# Altium PCB IRIS2_PCB_CPU.PcbDoc (part 1 of 2)
Units mil, origin at the board's own origin, x right, y up, seen from the top; angles counter-clockwise.
Board outline 3935 x 3935 mil, 4 copper layers (Top Layer, GND, Power, Bottom Layer), stack 67.17 mil thick; 109 components, 87 nets, 432 pads, 298 vias.
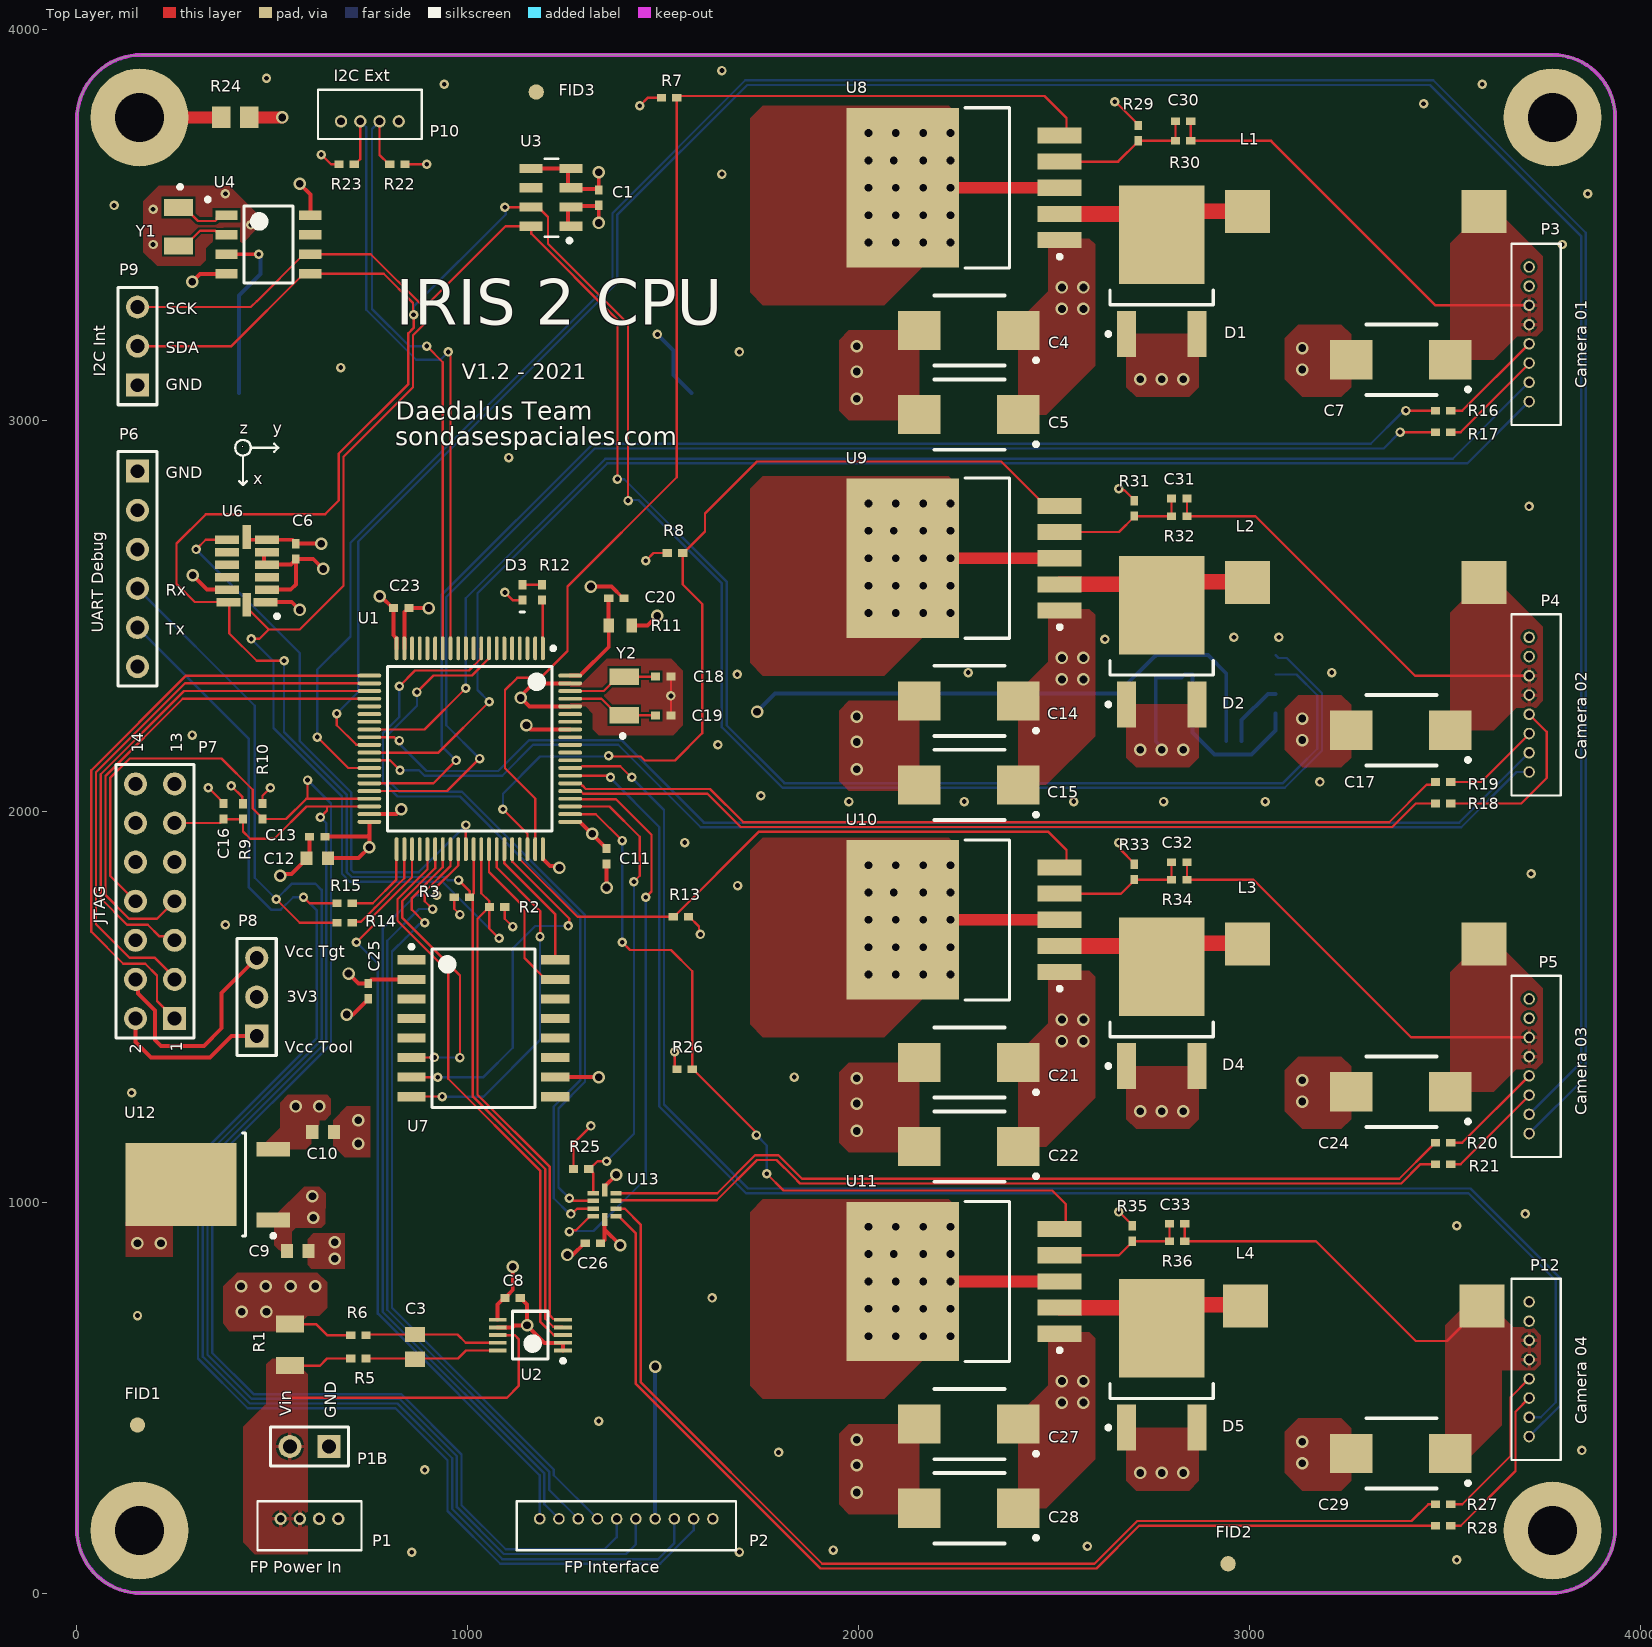
[diagram p0: Top Layer view]
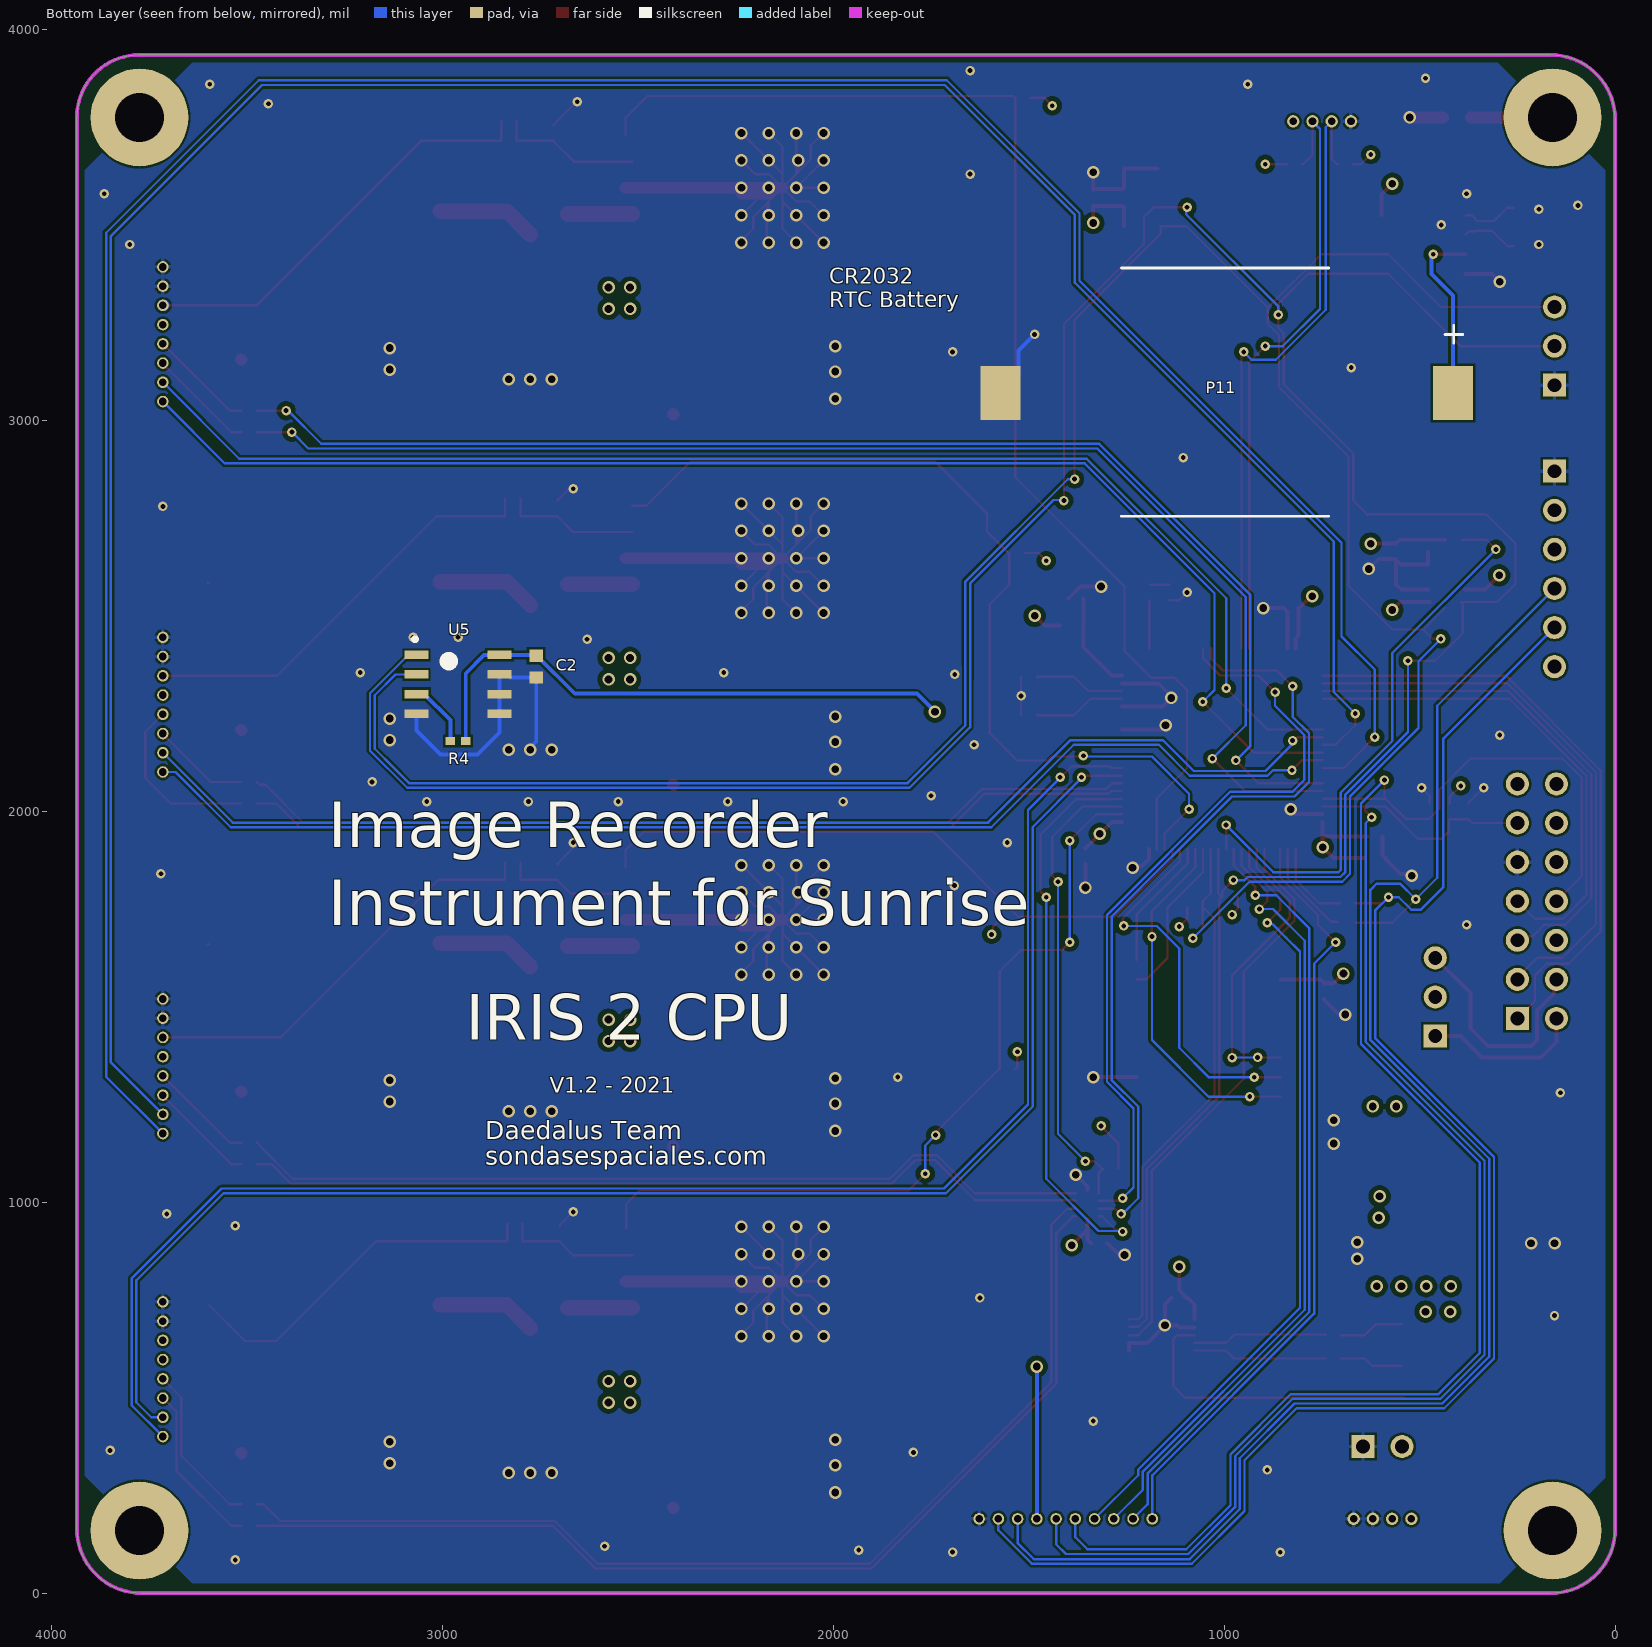
[diagram p1: Bottom Layer view, seen from below]
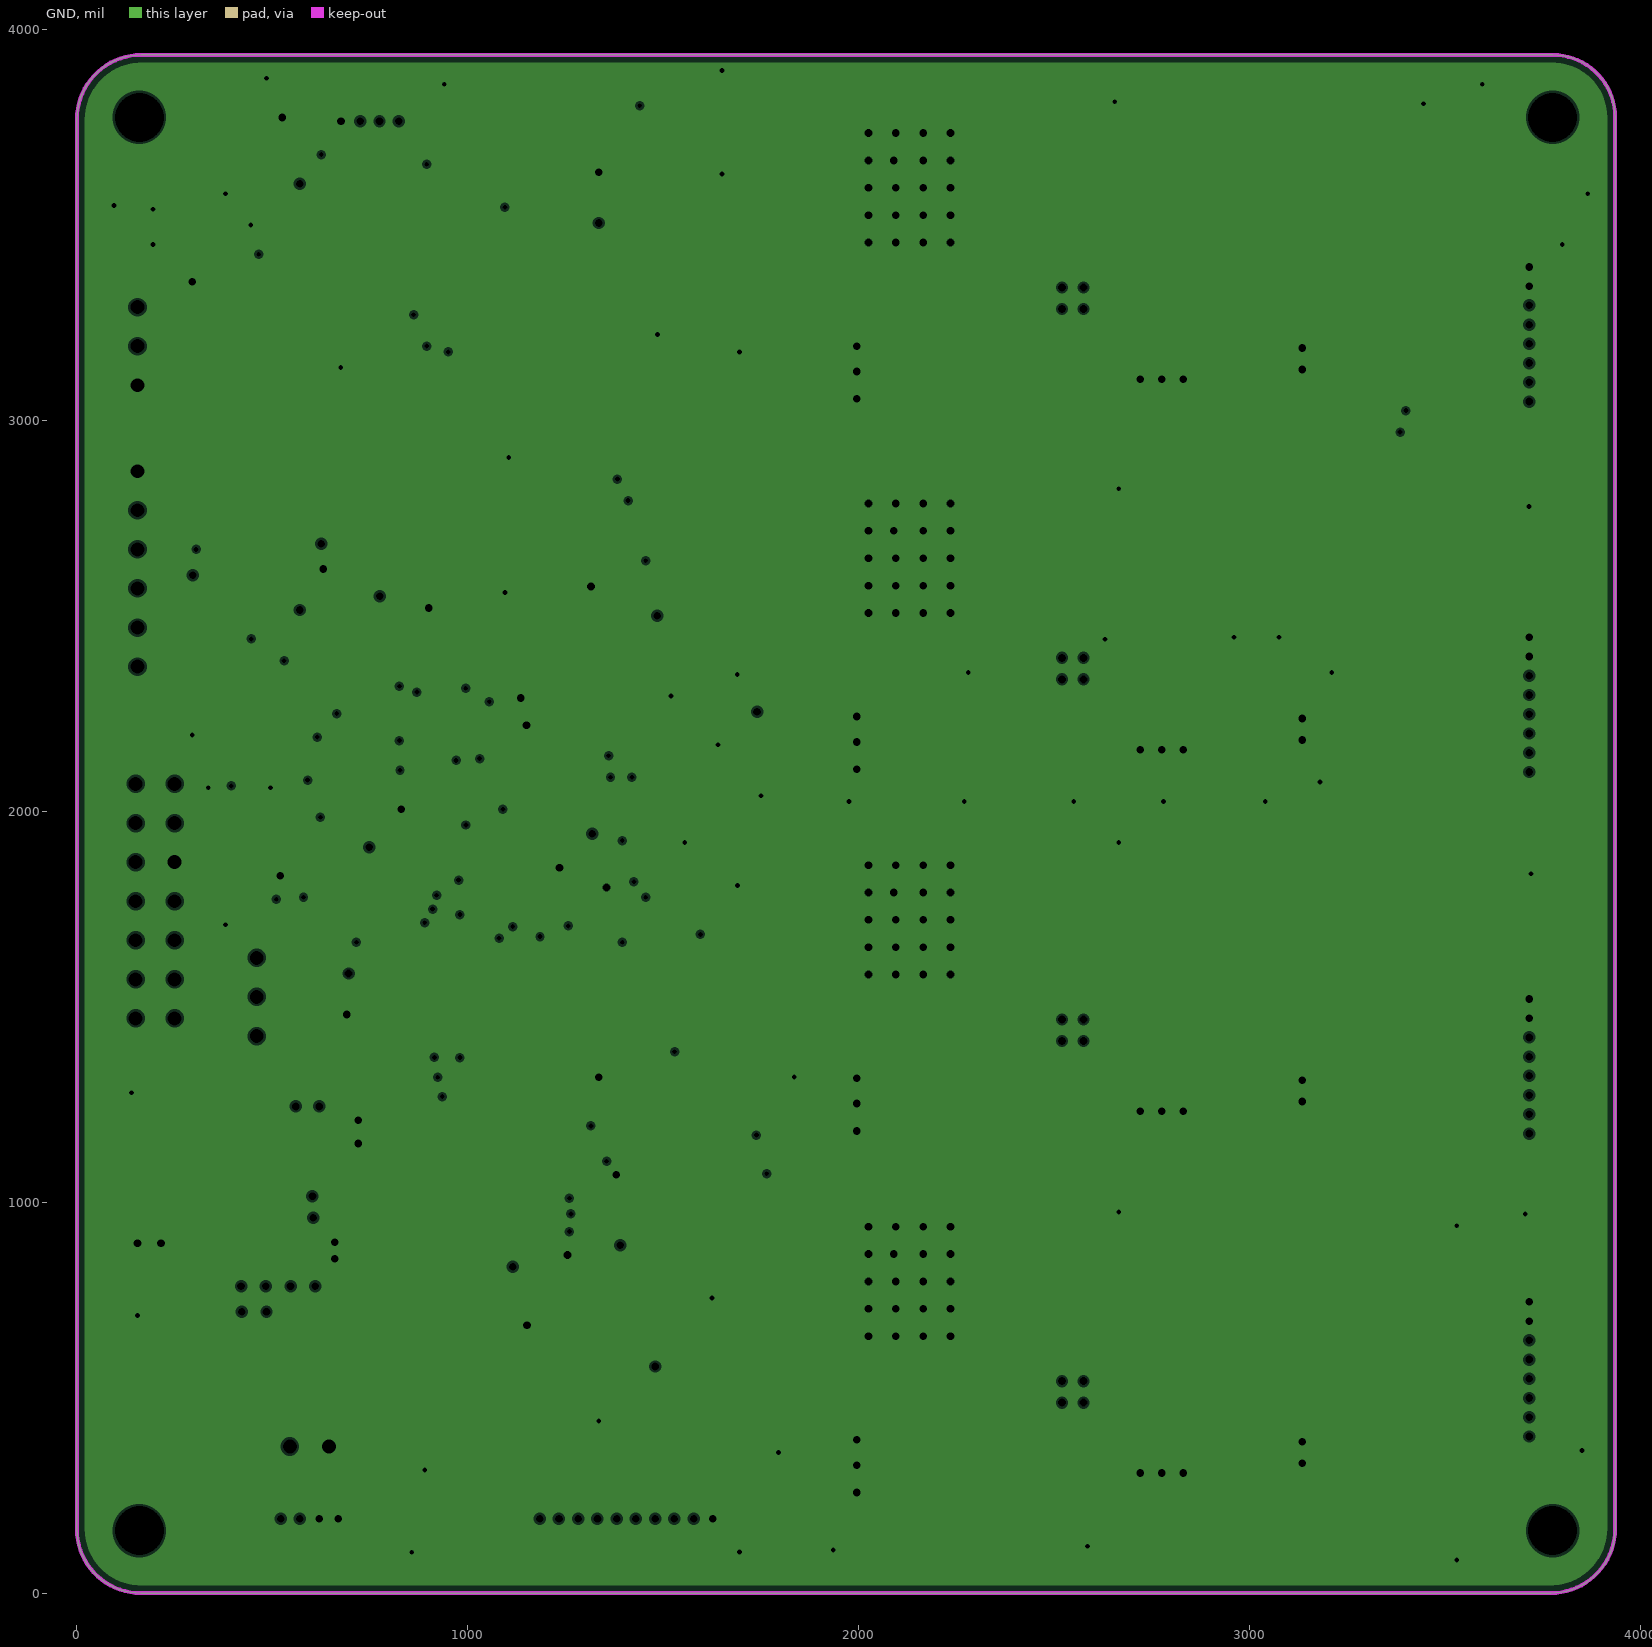
[diagram p2: GND, clearances drawn from the general rule]
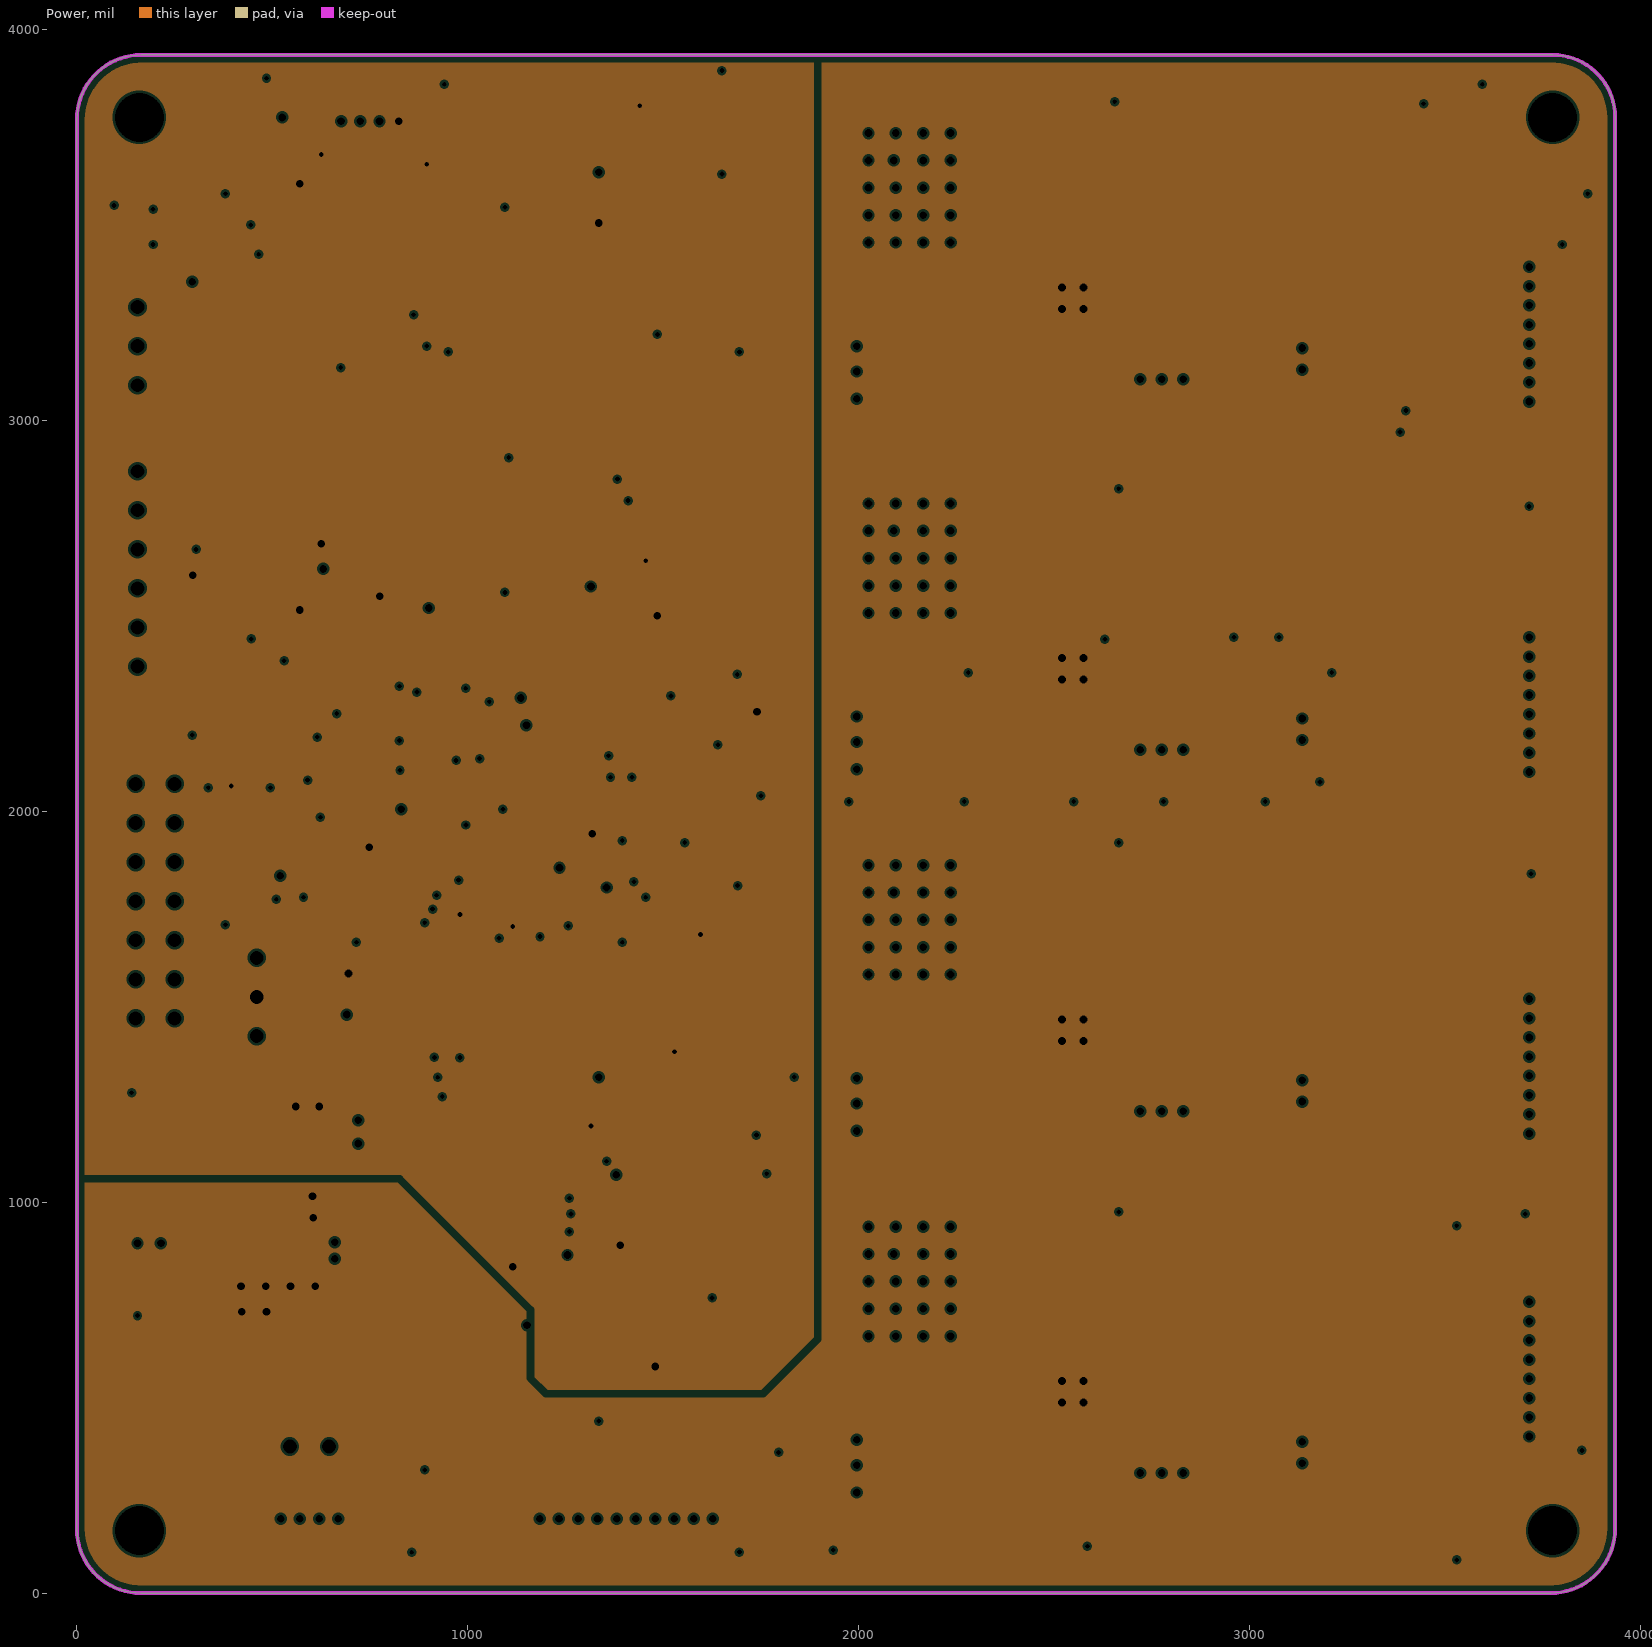
[diagram p3: Power, clearances drawn from the general rule]

## Layer stack, top to bottom
Top Solder: solder mask 0.4, Solder Resist, Dk 3.5
Top Layer: signal copper 1.4
Dielectric 2: prepreg 11.811, PP-006, Dk 4.1
GND: plane copper 0.689, net GND
Dielectric 1: dielectric 39.3701, FR-4, Dk 4.8
Power: plane copper 0.689, net (Multiple Nets)
Dielectric 3: prepreg 11.811, PP-006, Dk 4.1
Bottom Layer: signal copper 1.4
Bottom Solder: solder mask 0.4, Solder Resist, Dk 3.5

## Board outline
163.39,0 cw(c163.39,163.39) 0,163.39 0,3770 cw(c165,3770) 165,3935 3775.36,3935 cw(c3775.36,3775.36) 3935,3775.36 3935,165 cw(c3770,165) 3770,0

## Design rules (kind name [scope] priority, off if disabled: settings)
Clearance [All] p1: gap=6 ignorepadtopadclearanceinfootprint=TRUE except(0: Arc-Hole Track-Hole SMDPad-Hole THPad-Hole Via-Hole Fill-Hole Poly-Hole Region-Hole Text-Hole; 12: Arc-Via Track-Via SMDPad-Via THPad-Via Via-Via Via-Fill Via-Poly Via-Region)
PlaneClearance [All] p1: clearance=6
PlaneConnect [All] p1: pad.planeconnectstyle=Relief pad.reliefexpansion=10 pad.reliefentries=4 pad.reliefconductorwidth=10 pad.reliefairgap=10 via.planeconnectstyle=Direct via.reliefexpansion=20 via.reliefentries=4 via.reliefconductorwidth=10 via.reliefairgap=10
PolygonConnect [All] p1: thpad.connectstyle=Relief thpad.reliefconductorwidth=10 thpad.reliefentries=4 thpad.polygonreliefangle="90 Angle" thpad.airgapwidth=6 smdpad.connectstyle=Direct smdpad.reliefconductorwidth=10 smdpad.reliefentries=4 smdpad.polygonreliefangle="90 Angle" smdpad.airgapwidth=10 via.connectstyle=Direct via.reliefconductorwidth=10 via.reliefentries=4 via.polygonreliefangle="90 Angle" via.airgapwidth=10
RoomDefinition IRIS2_PCB_CPU [InComponentClass('IRIS2_PCB_CPU')] p1 off: confinementstyle=ConfineIn formatcopy=TRUE lockcomponents=FALSE outline 0,7565 2790,7565 2790,9835 0,9835
RoutingVias [All] p1: holewidth=11.81 width=6.02 viastyle="Through Hole" minholewidth=11.81 minwidth=6.02 maxholewidth=19.68 maxwidth=50
SolderMaskExpansion [All] p1: expansion=6 istentingtop=FALSE
Width [All] p1: maxlimit=100 minlimit=6 preferedwidth=6 minimp=50.000000 maximp=50.000000 favimp=50.000000
28 further rules are at their usual default settings.

## Components (designator, comment, footprint, x,y, rotation, side; value= is the part's Value field where it differs from the comment)
C1 "16V" 0402 1335,3570 r90 top value=100nF
C2 "10V" 1608[0603] 2760,2370 r270 bottom value=10uF
C3 "50V" 6-0805_L 865,630 r90 top value=100nF
C4 "Cap Pol2" "2917 [7343 Metric]" 2408.54,3230 r180 top value=220uF
C5 "Cap Pol2" "2917 [7343 Metric]" 2408.54,3015 r180 top value=220uF
C6 "16V" 0402 560,2665 r270 top value=100nF
C7 "Cap Pol2" "2917 [7343 Metric]" 3513.54,3155 r180 top value=220uF
C8 "16V" 0402 1114.69,755 r180 top value=100nF
C9 "Cap" 1608[0603] 565,875 r180 top value=1uF
C10 "10V" 1608[0603] 630,1180 r0 top value=10uF
C11 "16V" 0402 1355,1885 r270 top value=100nF
C12 "10V" 1608[0603] 615,1880 r180 top value=10uF
C13 "16V" 0402 615,1935 r180 top value=100nF
C14 "Cap Pol2" "2917 [7343 Metric]" 2408.54,2282.36 r180 top value=220uF
C15 "Cap Pol2" "2917 [7343 Metric]" 2408.54,2067.36 r180 top value=220uF
C16 "50V" 0402 375,2000 r90 top value=2nF
C17 "Cap Pol2" "2917 [7343 Metric]" 3513.54,2207.36 r180 top value=220uF
C18 "Cap" 0402 1500,2345 r0 top value=22p
C19 "Cap" 0402 1500,2245 r0 top value=22p
C20 "16V" 0402 1380,2545 r0 top value=100nF
C21 "Cap Pol2" "2917 [7343 Metric]" 2408.54,1357.36 r180 top value=220uF
C22 "Cap Pol2" "2917 [7343 Metric]" 2408.54,1142.36 r180 top value=220uF
C23 "16V" 0402 829.68,2520 r0 top value=100nF
C24 "Cap Pol2" "2917 [7343 Metric]" 3513.54,1282.36 r180 top value=220uF
C25 "16V" 0402 745,1540 r270 top value=100nF
C26 "16V" 0402 1320,895 r180 top value=100nF
C27 "Cap Pol2" "2917 [7343 Metric]" 2408.54,432.36 r180 top value=220uF
C28 "Cap Pol2" "2917 [7343 Metric]" 2408.54,217.36 r180 top value=220uF
C29 "Cap Pol2" "2917 [7343 Metric]" 3513.54,357.36 r180 top value=220uF
C30 "16V" 0402 2830,3765 r180 top value=100nF
C31 "16V" 0402 2820,2800 r180 top value=100nF
C32 "16V" 0402 2820,1870 r180 top value=100nF
C33 "16V" 0402 2814.69,945 r180 top value=100nF
D1 "VS-30WQ03FN Diode" VS-30WQ03FN 2775,3382.48 r90 top
D2 "VS-30WQ03FN Diode" VS-30WQ03FN 2775,2434.84 r90 top
D3 "Debug LED" 0402-A 1140,2560 r90 top
D4 "VS-30WQ03FN Diode" VS-30WQ03FN 2775,1509.84 r90 top
D5 "VS-30WQ03FN Diode" VS-30WQ03FN 2775,584.84 r90 top
FID1 "Fiducial for pick&place" FiducialPoint 155,430 r90 top
FID2 "Fiducial for pick&place" FiducialPoint 2945,75 r90 top
FID3 "Fiducial for pick&place" FiducialPoint 1175,3840 r90 top
L1 "Inductor" DO5022P-473MLB 3600,3535 r180 top value=47uH
L2 "Inductor" DO5022P-473MLB 3600,2585 r180 top value=47uH
L3 "Inductor" DO5022P-473MLB 3600,1660 r180 top value=47uH
L4 "Inductor" DO5022P-473MLB 3595,735 r180 top value=47uH
P1 "Header 4" 53047-0410 521.18,190 r0 top
P1B "Header 2" HDR1X2 645,375 r180 top
P2 "Header 10" 530471010 1282.36,190 r0 top
P3 "Header 8" 0530470810 3715,3048.15 r90 top
P4 "Header 8" 0530470810 3715,2100.51 r90 top
P5 "Header 8" 0530470810 3715,1175.51 r90 top
P6 "Header 6" HDR1X6 155,2870 r270 top
P7 "Header 7X2" HDR2X7 250,1470 r90 top
P8 "Header 3" HDR1X3 460,1425 r90 top
P9 "Header 3" HDR1X3 155,3090 r90 top
P10 "Header 4" 53047-0410 823.43,3765 r180 top
P11 "CR2032 Battery Holder" SMTU2032-LF 1572.48,3070 r180 bottom
P12 "Header 8" 0530470810 3715,400.51 r90 top
R1 "Res1" INDC3216 545,635 r90 top value=2m
R2 "Res1" 0402 1075,1755 r180 top value=4.75k
R3 "Res1" 0402 985,1780 r0 top value=4.75k
R4 "Res1" 0402 2960,2180 r0 bottom value=5K
R5 "Res1" 0402 720,600 r180 top value=10
R6 "Res1" 0402 720,660 r180 top value=10
R7 "Res1" 0402 1515,3825 r0 top value=47.5K
R8 "Res1" 0402 1530,2660.79 r0 top value=47.5K
R9 "Res1" 0402 425,1999.68 r270 top value=47.5K
R10 "Res1" 0402 475,2000 r90 top value=33K
R11 "Res1" J1-0603 1390,2475 r180 top value=0
R12 "Res1" 0402 1190,2560 r270 top value=1.37K
R13 "Res1" 0402 1545,1730 r180 top value=47.5K
R14 "Res1" 0402 685,1715 r180 top value=1.37K
R15 "Res1" 0402 685,1765 r180 top value=1.37K
R16 "Res1" 0402 3495,3025 r0 top value=1.37K
R17 "Res1" 0402 3495,2970 r0 top value=1.37K
R18 "Res1" 0402 3495,2020 r0 top value=1.37K
R19 "Res1" 0402 3495,2075 r0 top value=1.37K
R20 "Res1" 0402 3495,1152.36 r0 top value=1.37K
R21 "Res1" 0402 3495,1097.36 r0 top value=1.37K
R22 "Res1" 0402 820,3655 r180 top value=4.75k
R23 "Res1" 0402 690,3655 r0 top value=4.75k
R24 "Res1" 6-0805_N 405,3775 r180 top value=20M
R25 "Res1" 0402 1290,1085 r0 top value=47.5K
R26 "Res1" 0402 1554.68,1340 r0 top value=47.5K
R27 "Res1" 0402 3495,227.36 r0 top value=1.37K
R28 "Res1" 0402 3495,172.36 r0 top value=1.37K
R29 "Res1" 0402 2715,3735 r270 top value=1.37K
R30 "Res1" 0402 2830,3715 r180 top value=3K
R31 "Res1" 0402 2705,2775 r270 top value=1.37K
R32 "Res1" 0402 2820,2755 r180 top value=3K
R33 "Res1" 0402 2705,1845 r270 top value=1.37K
R34 "Res1" 0402 2820,1825 r180 top value=3K
R35 "Res1" 0402 2699.69,920 r270 top value=1.37K
R36 "Res1" 0402 2814.69,900 r180 top value=3K
U1 "MSP430FR5994" MSP430FR59941PN 1005,2160 r270 top
U2 "INA226-Q1 Power Monitor" INA226-Q1 1160,660 r180 top
U3 "MS5611-01BA01" MS5611-01BA01 1256.61,3496.57 r180 top
U4 "RTC DS1338Z-33+" DS1338Z-33+ 490,3450 r0 top
U5 "TMP75C-Q1" TMP75C-Q1 2960,2325 r180 bottom
U6 "ADXL345-EP" ADXL345-EP 435,2615 r180 top
U7 "S70FL01GS" SPIFlash_S70FL01GSAGMFV010 1040,1445 r0 top
U8 "5V Buck converter" DPAK170P1435X457-6N 2270,3595 r180 top
U9 "5V Buck converter" DPAK170P1435X457-6N 2270,2647.36 r180 top
U10 "5V Buck converter" DPAK170P1435X457-6N 2270,1722.36 r180 top
U11 "5V Buck converter" DPAK170P1435X457-6N 2270,797.36 r180 top
U12 "BD433M5FP-CE2" BD433M5FP-CE2 335,1045 r180 top locked
U13 "PI3USB221AZWEX" PI3USB221AZWEX 1350,995 r180 top
Y1 "XTAL" XTAL_ECS-.327-9-34R-TR 260,3495 r270 top
Y2 "XTAL" XTAL_ECS-.327-9-34R-TR 1400,2295 r90 top

## Footprints (in the part's own frame and the unit in brackets; to place one, negate y for a bottom-side part, rotate by r counter-clockwise, add the part's x,y. Pads: shape width x height; smd on the part's side, far side on the other; paste and mask are expansions set on the pad)
6-0805_L [mm] "Chip Resistor, Body 2.0x1.2mm, IPC High Density"
  rect 1x1.3 smd: 1(-0.8,0) 2(0.8,0)
  body extent -1.07,-0.7 1.07,0.7, height 0.7
6-0805_N [mm] "Chip Resistor, Body 2.0x1.2mm, IPC Medium Density"
  rect 1.2x1.4 smd: 1(-0.9,0) 2(0.9,0)
  body extent -1.07,-0.7 1.07,0.7, height 0.7
0402 [mm] "Chip Capacitor, Body 1.0x0.5mm, IPC High Density"
  rect 0.6x0.5 smd: 1(-0.5,0) 2(0.5,0)
  body extent -0.55,-0.3 0.55,0.3, height 1.3
0402-A [mm] "Chip Inductor, Body 1.0x0.5mm, IPC High Density"
  rect 0.6x0.5 smd: 1(-0.5,0) 2(0.5,0)
  silkscreen extent -1.27,-0.13 -1.27,0.17, body extent -0.55,-0.3 0.55,0.3, height 0.55
1608[0603] [mm] "Chip Capacitor, Body 1.6x0.8mm, IPC High Density"
  rect 0.8x0.9 smd: 1(-0.7,0) 2(0.7,0)
  body extent -0.87,-0.48 0.87,0.48, height 1.3
"2917 [7343 Metric]" [mm]
  rect 2.77x2.55 smd: 1(0,0) 2(6.44,0)
  silkscreen extent -1.27,-2.29 5.46,2.29, body extent -0.5,-2.29 7.1,2.31, height 3.11
53047-0410 [mm] "Molex_Picoblade_4pin_53047-0410"
  round 0.8 hole 0.5: 1(3.75,0) 2(2.5,0) 3(1.25,0) 4(0,0)
  silkscreen extent -1.5,-2.05 5.25,1.15, body extent -1.5,-2.05 5.25,1.15, height 4.23
0530470810 [mm] "Molex 0530470810"
  round 0.75 hole 0.5: 1(8.75,0) 2(7.5,0) 3(6.25,0) 4(5,0) 5(3.75,0) 6(2.5,0) 7(1.25,0) 8(0,0)
  silkscreen extent -1.52,-2.05 10.25,1.15, body extent -1.5,-2.05 10.25,1.15, height 4.25
530471010 [mm] "Molex_Picoblade_10pin_530471010"
  round 0.75 hole 0.5: 1(8.75,0) 2(7.5,0) 3(6.25,0) 4(5,0) 5(3.75,0) 6(2.5,0) 7(1.25,0) 8(0,0) 9(-1.25,0) 10(-2.5,0)
  silkscreen extent -3.99,-2.05 10.25,1.15, body extent -3.99,-2.05 10.26,1.15, height 4.25
ADXL345-EP [mm] "PQFN, 14-Leads, Body 3,00x5,00mm, Pitch 0,80mm/0,81mm, IPC Medium Density"
  rect 1.545x0.55 smd: 1(-1.2,2.025) 2(-1.3,1.215) 3(-1.3,0.405) 4(-1.3,-0.405) 5(-1.3,-1.215) 6(-1.3,-2.025) 8(1.3,-2.025) 9(1.3,-1.215) 10(1.3,-0.405) 11(1.3,0.405) 12(1.3,1.215) 13(1.2,2.025)
  rect 0.55x1.545 smd: 7(0,-2.2) 14(0,2.2)
  silkscreen extent -2.08,2.83 -1.83,3.07, body extent -1.5,-2.5 1.5,2.5, height 1
BD433M5FP-CE2 [mm] "D-PAK, 3-Pads, Body 5,95x6,71mm (max), IPC Medium Density"
  rect 2.2x0.95 smd: 1(-4.25,2.3) 3(-4.25,-2.3)
  rect 7.2x5.4 smd: 4(1.75,0)
  silkscreen extent -4.38,-3.35 -2.25,3.45, body extent -2.45,-3.35 4.89,3.35, height 2.5
DO5022P-473MLB [mil] "Inductor DO5022P-473MLB"
  rect 115x110 smd: 1(0,0) 2(605,0)
  body extent 52,-250 552,250, height 280
DPAK170P1435X457-6N [mm] "D2-PAK, 6-Pads, Body 7,55x8,54mm (max), IPC Medium Density"
  rect 2.85x1.05 smd: 1(-6.2,3.4) 2(-6.2,1.7) 3(-6.2,0) 4(-6.2,-1.7) 5(-6.2,-3.4)
  rect 7.3x10.35 smd: 6(4,0)
  silkscreen extent -6.33,-5.2 -0.05,5.2, body extent -7.23,-5.17 6.98,5.18, height 4.57
DS1338Z-33+ [mm] "TSOP, 8-Leads, Body 4,90x3,90mm, Pitch 1,27mm, IPC Medium Density"
  rect 1.45x0.6 smd: 1(-2.725,1.905) 2(-2.725,0.635) 3(-2.725,-0.635) 4(-2.725,-1.905) 5(2.725,-1.905) 6(2.725,-0.635) 7(2.725,0.635) 8(2.725,1.905)
  silkscreen extent -4.06,-2.5 1.6,3.05, body extent -2,-2.5 2,2.5, height 1.55
FiducialPoint [mm] "FiducialPoint 1mm"
  round 1 smd mask+0.5: 0(0,0)
HDR1X2 [mm] "Connector; Header; 2 Position"
  rect 1.5x1.5 hole 0.9: 1(0,0)
  round 1.5 hole 0.9: 2(2.54,0)
  silkscreen extent -1.27,-1.27 3.81,1.27
HDR1X3 [mm] "Connector; Header; 3 Position"
  rect 1.5x1.5 hole 0.9: 1(0,0)
  round 1.5 hole 0.9: 2(2.54,0) 3(5.08,0)
  silkscreen extent -1.27,-1.27 6.35,1.27
HDR1X6 [mm] "Connector; Header; 6 Position"
  rect 1.5x1.5 hole 0.9: 1(0,0)
  round 1.5 hole 0.9: 2(2.54,0) 3(5.08,0) 4(7.62,0) 5(10.16,0) 6(12.7,0)
  silkscreen extent -1.27,-1.27 13.97,1.27
HDR2X7 [mm] "Connector; Header; 7x2 Position"
  rect 1.5x1.5 hole 0.9: 1(0,0)
  round 1.5 hole 0.9: 2(0,2.54) 3(2.54,0) 4(2.54,2.54) 5(5.08,0) 6(5.08,2.54) 7(7.62,0) 8(7.62,2.54) 9(10.16,0) 10(10.16,2.54) 11(12.7,0) 12(12.7,2.54) 13(15.24,0) 14(15.24,2.54)
  silkscreen extent -1.27,-1.27 16.51,3.81
INA226-Q1 [mm] "Texas Instruments INA226-Q1 I2C temperature sensor"
  rect 1.15x0.25 smd: 1(-2.125,1) 2(-2.125,0.5) 3(-2.125,0) 4(-2.125,-0.5) 5(-2.125,-1) 6(2.125,-1) 7(2.125,-0.5) 8(2.125,0) 9(2.125,0.5) 10(2.125,1)
  silkscreen extent -2.25,-1.55 1.15,1.8, body extent -1.55,-1.55 1.55,1.55, height 1.1
INDC3216 [mm] "Chip Inductor, Body 3.2x1.6mm, IPC High Density"
  rect 1.1x1.8 smd: 1(-1.35,0) 2(1.35,0)
  body extent -1.7,-0.9 1.7,0.9, height 0.55
J1-0603 [mm] "Chip Resistor, Body 1.6x0.8mm, IPC High Density"
  rect 0.7x0.9 smd: 1(-0.75,0) 2(0.75,0)
  body extent -0.85,-0.48 0.85,0.48, height 0.9
MS5611-01BA01 [mm]
  rect 1.5x0.6 smd: 1(-0.2,0) 2(-0.2,-1.25) 3(-0.2,-2.5) 4(-0.2,-3.75) 5(2.4,-3.75) 6(2.4,-2.5) 7(2.4,-1.25) 8(2.4,0)
  silkscreen extent -0.21,-4.39 1.52,1.05, body extent -0.43,-4.4 2.62,0.68, height 1.7
MSP430FR59941PN [mm] "TSQFP, 80-Leads, Body 12,00x12,00mm, Pitch 0,50mm, IPC Low Density"
  oval 1.55x0.25 smd: 1(-6.525,4.75) 2(-6.525,4.25) 3(-6.525,3.75) 4(-6.525,3.25) 5(-6.525,2.75) 6(-6.525,2.25) 7(-6.525,1.75) 8(-6.525,1.25) 9(-6.525,0.75) 10(-6.525,0.25) 11(-6.525,-0.25) 12(-6.525,-0.75) 13(-6.525,-1.25) 14(-6.525,-1.75) 15(-6.525,-2.25) 16(-6.525,-2.75) 17(-6.525,-3.25) 18(-6.525,-3.75) 19(-6.525,-4.25) 20(-6.525,-4.75) 41(6.525,-4.75) 42(6.525,-4.25) 43(6.525,-3.75) 44(6.525,-3.25) 45(6.525,-2.75) 46(6.525,-2.25) 47(6.525,-1.75) 48(6.525,-1.25) 49(6.525,-0.75) 50(6.525,-0.25) 51(6.525,0.25) 52(6.525,0.75) 53(6.525,1.25) 54(6.525,1.75) 55(6.525,2.25) 56(6.525,2.75) 57(6.525,3.25) 58(6.525,3.75) 59(6.525,4.25) 60(6.525,4.75)
  oval 0.25x1.55 smd: 21(-4.75,-6.525) 22(-4.25,-6.525) 23(-3.75,-6.525) 24(-3.25,-6.525) 25(-2.75,-6.525) 26(-2.25,-6.525) 27(-1.75,-6.525) 28(-1.25,-6.525) 29(-0.75,-6.525) 30(-0.25,-6.525) 31(0.25,-6.525) 32(0.75,-6.525) 33(1.25,-6.525) 34(1.75,-6.525) 35(2.25,-6.525) 36(2.75,-6.525) 37(3.25,-6.525) 38(3.75,-6.525) 39(4.25,-6.525) 40(4.75,-6.525) 61(4.75,6.525) 62(4.25,6.525) 63(3.75,6.525) 64(3.25,6.525) 65(2.75,6.525) 66(2.25,6.525) 67(1.75,6.525) 68(1.25,6.525) 69(0.75,6.525) 70(0.25,6.525) 71(-0.25,6.525) 72(-0.75,6.525) 73(-1.25,6.525) 74(-1.75,6.525) 75(-2.25,6.525) 76(-2.75,6.525) 77(-3.25,6.525) 78(-3.75,6.525) 79(-4.25,6.525) 80(-4.75,6.525)
  silkscreen extent -6.65,-5.35 5.35,5.55, body extent -6,-6 6,6, height 1.6
PI3USB221AZWEX [mm] "PI3USB221AZWEX UQFN"
  rect 0.73x0.3 smd: 1(-0.74,0.789) 2(-0.74,0.289) 3(-0.74,-0.211) 4(-0.74,-0.711) 6(0.74,-0.711) 7(0.74,-0.211) 8(0.74,0.289) 9(0.74,0.789)
  rect 0.35x0.83 smd: 5(0,-0.911) 10(0,0.989)
  body extent -0.77,-0.99 0.76,1.04, height 0.65
SMTU2032-LF [mm]
  rect 2.6x3.5 smd: 1(0,0) 2(29.4,0)
  silkscreen extent 7.87,-8 30.04,8.13, body extent -1.17,-8.05 30.63,8.05, height 5.38
SPIFlash_S70FL01GSAGMFV010 [mm] "SOIC, 16-Leads, Body 10,30x7,50mm, Pitch 1,27mm, IPC Medium Density"
  rect 1.85x0.6 smd: 1(-4.675,4.445) 2(-4.675,3.175) 3(-4.675,1.905) 4(-4.675,0.635) 5(-4.675,-0.635) 6(-4.675,-1.905) 7(-4.675,-3.175) 8(-4.675,-4.445) 9(4.675,-4.445) 10(4.675,-3.175) 11(4.675,-1.905) 12(4.675,-0.635) 13(4.675,0.635) 14(4.675,1.905) 15(4.675,3.175) 16(4.675,4.445)
  silkscreen extent -4.8,-5.15 3.35,5.42, body extent -3.75,-5.15 3.75,5.15, height 2.65
TMP75C-Q1 [mm] "TMP75C-Q1 SOIC 8"
  rect 1.55x0.55 smd: 1(-2.7,1.905) 2(-2.7,0.635) 3(-2.7,-0.635) 4(-2.7,-1.905) 5(2.7,-1.905) 6(2.7,-0.635) 7(2.7,0.635) 8(2.7,1.905)
  silkscreen extent -2.92,1.2 -0.3,3.05, body extent -2,-2.5 2,2.5, height 1.75
VS-30WQ03FN [mm] "D-PAK, 4-Pads, Body 6,21x6,73mm (max), IPC Medium Density"
  rect 3x1.25 smd: 1(-4.1,2.29) 3(-4.1,-2.29)
  rect 6.4x5.55 smd: 4(2.35,0)
  silkscreen extent -4.22,-3.35 -1.25,3.59, body extent -2.55,-3.37 3.67,3.37, height 2.39
XTAL_ECS-.327-9-34R-TR [mm]
  rect 1.1x1.9 smd: 1(-1.25,0) 2(1.25,0)
  silkscreen extent -2.7,0 -2.5,0.2

## Part data
C1 C2 C3 C6 C8 C10 C11 C12 C13 C16 C20 C23 C25 C26: library part Cap, "Capacitor", Manufacturer=Murata, LatestRevisionDate=17-Jul-2002, LatestRevisionNote="Re-released for DXP Platform.", PackageDescription="Radial Cap, Thru-Hole; 2 Leads; 0.3 in Pin Spacing", PackageReference=RAD-0.3, Published=8-Jun-2000, Publisher="Altium Limited"
  C1 C6 C8 C11 C13 C20 C23 C25 C26: Reference=GCM155R71C104KA55D
  C2 C10 C12: Reference=GRT188R61A106ME13D
  C3: Reference=GCJ21BR71H104KA01L
  C16: Reference=GRM1557U1A202JA01D
C4 C5 C7 C14 C15 C17 C21 C22 C24 C27 C28 C29: "Polarized Capacitor (Axial)", Manufacturer=Kemet, Reference=T491D227M016AT
C9 C18 C19: "Capacitor", Manufacturer=Murata, LatestRevisionDate=17-Jul-2002, LatestRevisionNote="Re-released for DXP Platform.", PackageDescription="Radial Cap, Thru-Hole; 2 Leads; 0.3 in Pin Spacing", Publisher="Altium Limited"
  C9: Reference=GRT188R61H105ME13D
  C18 C19: Reference=GCQ1555C1H220GB01D
C30 C31 C32 C33: library part Cap, "Capacitor", LatestRevisionDate=17-Jul-2002, LatestRevisionNote="Re-released for DXP Platform.", PackageDescription="Radial Cap, Thru-Hole; 2 Leads; 0.3 in Pin Spacing", PackageReference=RAD-0.3, Published=8-Jun-2000, Publisher="Altium Limited", Reference=DNP
D1 D2 D4 D5: library part VS-30WQ03FN, Manufacturer=Vishay, Reference=VS-30WQ03FN
D3: library part LED2, "Typical RED, GREEN, YELLOW, AMBER GaAs LED", Manufacturer="ROHM Semiconductor", LatestRevisionDate=17-Jul-2002, LatestRevisionNote="Re-released for DXP Platform.", PackageDescription="SM LED; 2 Flat Leads", PackageReference=3.2X1.6X1.1, PackageVersion=Feb-2002, Published=8-Jun-2000, Publisher="Altium Limited", Reference=SMLP13EC8TT86
FID1 FID2 FID3: library part Fiducial
L1 L2 L3 L4: Manufacturer=Coilcraft, Reference=DO5022P-473MLB
P1 P10: "Header, 4-Pin", Manufacturer=Molex, LatestRevisionDate=17-Jul-2002, LatestRevisionNote="Re-released for DXP Platform.", Publisher="Altium Limited", Reference=0530470410
P1B: "Header, 2-Pin", LatestRevisionDate=17-Jul-2002, LatestRevisionNote="Re-released for DXP Platform.", Publisher="Altium Limited"
P2: "Header, 10-Pin", Manufacturer=Molex, Reference=530471010
P3 P4 P5 P12: "Header, 8-Pin", Manufacturer=Molex, Reference=0530470810
P6: "Header, 6-Pin", LatestRevisionDate=17-Jul-2002, LatestRevisionNote="Re-released for DXP Platform.", Publisher="Altium Limited"
P7: "Header, 7-Pin, Dual row", LatestRevisionDate=17-Jul-2002, LatestRevisionNote="Re-released for DXP Platform.", Publisher="Altium Limited"
P8 P9: "Header, 3-Pin", LatestRevisionDate=17-Jul-2002, LatestRevisionNote="Re-released for DXP Platform.", Publisher="Altium Limited"
P11: library part "Header 2", Manufacturer=Renata, Reference=SMTU2032-LF
R1: "Resistor", Manufacturer="ROHM Semiconductor", Spplier Part Number=755-PMR18EZPFV2L00, LatestRevisionDate=17-Jul-2002, LatestRevisionNote="Re-released for DXP Platform.", PackageDescription="Axial Device, Thru-Hole; 2 Leads; 0.3 in Pin Spacing", PackageReference=AXIAL-0.3, Published=8-Jun-2000, Publisher="Altium Limited", Reference=PMR18EZPFV2L00, Supplier=Mouser
R2 R3 R22 R23: "Resistor", Manufacturer=Panasonic, Supplier Part Number 1=667-ERJ-2RKF1002X, LatestRevisionDate=17-Jul-2002, LatestRevisionNote="Re-released for DXP Platform.", PackageDescription="Axial Device, Thru-Hole; 2 Leads; 0.3 in Pin Spacing", PackageReference=AXIAL-0.3, Publisher="Altium Limited", Reference=ERJ-2RKF4751X, Supplier 1=Mouser
R4 R7 R8 R9 R10 R11 R13 R25 R26: "Resistor", Manufacturer=Panasonic, LatestRevisionDate=17-Jul-2002, LatestRevisionNote="Re-released for DXP Platform.", PackageReference=AXIAL-0.3, Published=8-Jun-2000
  R4 R10: Component Description="RES 47.5K OHM 1/10W 1% 0603 SMD", Publisher="Altium Limited", Reference=ERJ-2GEJ333X
  R7 R8 R9 R13 R25 R26: Component Description="RES 47.5K OHM 1/10W 1% 0603 SMD", Reference=ERJ-2RKF4752X
  R11: PackageDescription="Axial Device, Thru-Hole; 2 Leads; 0.3 in Pin Spacing", Publisher="Altium Limited", Reference=ERJ-3GEY0R00V
R5 R6: "Resistor", Manufacturer=Panasonic, Supplier Part Number 1=667-ERJ-2RKD10R0X, LatestRevisionDate=17-Jul-2002, LatestRevisionNote="Re-released for DXP Platform.", PackageDescription="Axial Device, Thru-Hole; 2 Leads; 0.3 in Pin Spacing", PackageReference=AXIAL-0.3, Publisher="Altium Limited", Reference=ERJ2RKD10R0X, Supplier 1=Mouser
R12 R14 R15 R16 R17 R18 R19 R20 R21 R27 R28 R29 R31 R33 R35: "Resistor", Manufacturer=Panasonic, Supplier Part Number 1=667-ERJ-2RKF1371X, LatestRevisionDate=17-Jul-2002, LatestRevisionNote="Re-released for DXP Platform.", PackageDescription="Axial Device, Thru-Hole; 2 Leads; 0.3 in Pin Spacing", Published=8-Jun-2000, Publisher="Altium Limited", Reference=ERJ-2RKF1371X, Supplier 1=Mouser
R24: "Resistor", Manufacturer=KOA, Supplier Part Number 1=667-ERJ-2RKF1002X, LatestRevisionDate=17-Jul-2002, LatestRevisionNote="Re-released for DXP Platform.", PackageDescription="Axial Device, Thru-Hole; 2 Leads; 0.3 in Pin Spacing", PackageReference=AXIAL-0.3, Publisher="Altium Limited", Reference=RK73B2ATTD206J, Supplier 1=Mouser
R30 R32 R34 R36: "Resistor", Manufacturer=Vishay, Supplier Part Number 1=667-ERJ-2RKF1371X, LatestRevisionDate=17-Jul-2002, LatestRevisionNote="Re-released for DXP Platform.", PackageDescription="Axial Device, Thru-Hole; 2 Leads; 0.3 in Pin Spacing", Published=8-Jun-2000, Publisher="Altium Limited", Reference=CRCW04023K00FKEDC, Supplier 1=Mouser
U1: "MSP430FR5994, 80 pin MSP430 FRAM", Manufacturer="Texas Instruments", Reference=MSP430FR5994IPNR
U2: library part INA226-Q1, "Texas Instruments INA226-Q1 I2C temperature sensor INA226AQDGSRQ1", Manufacturer="Texas Instruments", Reference=INA226-Q1
U3: "MS5611-01BA01 Barometric Pressure Sensor", Manufacturer="measurement specialties", Reference=MS561101BA03-50
U4: library part DS1338Z-33+, "RTC I2C DS1338Z-33+ SOIC-8", Manufacturer="Maxim Integrated", Reference=DS1338Z-33+
U5: Manufacturer="Texas Instruments", Reference=TMP175AIDR
U6: "ADXL345-EP I2C Accelerometer", Manufacturer="Analog Devices", Reference=ADXL345-EP
U7: "S70FL01GS SPI NOR Flash", Manufacturer=Cypress, Reference=S70FL01GSAGMFV010
U8 U9 U10 U11: library part LM2596S-5.0/NOPB, "LM2596S-5.0/NOPB 5V Buck converter", Manufacturer="Texas Instruments", Reference=LM2596S-5.0/NOPB
U12: "BD433M5FP-CE2 / LDO 3.3V 500mV", Manufacturer="ROHM Semiconductor", Reference=BD433M5FP-CE2
U13: "PI3USB221AZWEX Multiplexer", Manufacturer="Diodes Incorporated", Reference=PI3USB221AZWEX
Y1 Y2: "Crystal Oscillator", Manufacturer=ECS, Reference=ECS-.327-9-34R-TR

## Free pads (board coordinates)
  round 250 hole 125: 1(160,160) 1(160,3775) 1(3775,160) 1(3775,3775)

## Via types
v1: diameter 32, hole 19.68, Top Layer to Bottom Layer, tented both sides, 175 vias
v2: diameter 24.2, hole 12.2, Top Layer to Bottom Layer, tented both sides, 123 vias

## Nets (pads, with @x,y where several pads share a name; then routed paths per layer and width w, separated by ;. In a path a pad name is that pad's centre, name@x,y a point inside that pad or via, vN(x,y) a via of type N, cw(c..) or ccw(c..) an arc to the next point about the centre after c; other vN are vias at no path point)
3.3V: C1.1 C2.1 C6.1 C8.2 C10.1 C11.1 C12.1 C13.1 C23.1 C25.1 C26.1 P2.4 P8.2 P10.4 R2.1 R3.1 R4.1 R7.1 R8.1 R9.1 R11.1 R13.1 R22.1 R23.1 R25.1 R26.1 U1.20 U1.40 U1.61 U2.6 U3.1 U3.2 U4.8 U5.8 U6.1 U6.6 U6.7 U6.12 U7.2 U12.3 U13.10 | length 4268.7
  Top Layer w6: v2(395,2065) 423.33,2036.67 423.33,2021.04 R9.1@425,2019.37 ; v2(625,3680) 650,3655 R23.1@670.32,3655 ; R22.1@839.68,3655 v2(895,3655) ; R3.1@965.32,1780 965.32,1750.87 980,1736.18 v2(980,1735.71) ; R2.1@1094.68,1755 1094.68,1725.32 v2(1115,1705) ; R25.1@1270.32,1085 1270.32,1150.32 v2(1315,1195) ; v2(1440,3805) 1460,3825 R7.1@1495.32,3825 ; v2(1455,2640.79) 1475,2660.79 R8.1@1510.32,2660.79 ; v2(1529.1,1385) 1529.1,1345.9 R26.1@1535,1340 ; R13.1@1564.68,1730 1566.65,1730 1591.52,1705.14 1591.52,1688.48 v2(1595,1685)
  Top Layer w10: v1(296.54,2603.46) 332.83,2567.17 U6.12@383.82,2567.17 ; U6.7@435,2693.74 435.98,2694.72 U6.6@486.18,2694.72 551.93,2694.72 560,2686.65 C6.1@560,2684.68 v1(625.32,2684.68) v1@630,2680 ; U6.1@474.37,2535.28 U6.1@482.24,2535.28 549.72,2535.28 v1@575,2510 ; v1(570,3605) 597.28,3577.72 U4.8@597.28,3525 ; C13.1@634.68,1935 742.56,1935 748.11,1940.55 ; C12.1@642.56,1880 720,1880 v1(748.11,1908.11) 748.11,1940.55 ; v1(695,1585) 720.32,1559.68 C25.1@745,1559.68 745,1561.65 753.35,1570 U7.2@855.94,1570 ; U1.40@748.11,1972.99 748.11,1940.55 ; v1(775,2550) 778.03,2550 808.03,2520 C23.1@810,2520 810,2450.32 817.99,2442.32 U1.20@817.99,2416.89 ; U2.6@1076.34,699.37 1076.34,738.31 1093.03,755 C8.2@1095,755 1096.97,755 1101.81,759.84 1101.81,761.81 1115,775 v1(1115,835) ; U3.1@1256.61,3496.57 1256.61,3545.79 1258.88,3548.05 1332.74,3548.05 C1.1@1335,3550.32 v1(1335,3505) ; U1.61@1261.97,1972.91 U1.61@1261.89,1972.99 1287.32,1972.99 1348.82,1911.5 1350.16,1911.5 1355,1906.65 C11.1@1355,1904.68 ; C26.1@1339.68,895 1341.65,895 1350,903.35 1350,930 ; U13.10@1350,956.06 1350,930 ; v1(1390,890) 1350,930 ; R11.1@1419.53,2475 1460,2475 v1(1485,2500)
  Bottom Layer w10: P2.4@1479.21,190 1479.21,579.21 v1(1479.61,579.61) v1@1480,580 ; v1(1740,2255) 1786,2301 2661.47,2301 2758.03,2397.56 C2.1@2760,2397.56 2762.44,2400 U5.8@2853.7,2400 2854.36,2399.34 2893.35,2399.34 2940.32,2352.38 R4.1@2940.32,2180
  other v1: 560,1245 620,1245 1318.07,1942.24 570,2515
5V_CAM01: C7.1 C30.1 L1.1 P3.3 P3.4 R30.1 | length 1093
  Top Layer w6: C30.1@2849.68,3765 R30.1@2849.68,3715 3055,3715 3475.79,3294.21 P3.3@3715,3294.21
  Top Layer w30: C7.1@3513.54,3155 C7.1@3515,3156.46
  Bottom Layer w30: P3.3@3713.64,3294.21 P3.3@3715,3294.21
5V_CAM02: C17.1 C31.1 L2.1 P4.3 P4.4 R32.1 | length 1094.1
  Top Layer w6: C31.1@2839.68,2800 R32.1@2839.68,2755 3015,2755 3423.43,2346.57 P4.3@3715,2346.57 ; L2.1@3597.5,2585 L2.1@3600,2585
  Top Layer w30: C17.1@3513.54,2207.36 C17.1@3515,2208.82
5V_CAM03: C24.1 C32.1 L3.1 P5.3 P5.4 R34.1 | length 1092
  Top Layer w6: C32.1@2839.68,1870 R34.1@2839.68,1825 3010,1825 3413.43,1421.57 P5.3@3715,1421.57 ; L3.1@3597.5,1660 L3.1@3600,1660
  Top Layer w30: C24.1@3513.54,1282.36 C24.1@3515,1283.82
5V_CAM04: C29.1 C33.1 L4.1 P12.3 P12.4 R36.1 | length 950.6
  Top Layer w6: C33.1@2834.37,945 R36.1@2834.37,900 3170,900 3425,645 3505,645 L4.1@3595,735
  Top Layer w30: C29.1@3513.54,357.36 C29.1@3515,358.82
5VPOWER_EN_01: R7.2 U1.59 U8.5 | length 3238.2
  Top Layer w6: U1.59@1172.32,1903.11 1172.32,2032.68 1095,2110 1095,2310 1126.32,2341.32 1186.32,2341.32 1255,2410 1255,2575 1534.69,2854.69 R7.2@1534.69,3825 1539.68,3830 2475,3830 2531.57,3773.43 U8.5@2531.57,3728.86
5VPOWER_EN_02: R8.2 U1.58 U9.5 | length 2369.1
  Top Layer w6: v2(1090,2005) 1152.64,1942.36 U1.58@1152.64,1903.11 ; v2(1360,2142.1) 1362.1,2140 1442.46,2140 1452.46,2130 1530,2130 1600,2200 1600,2530 1549.69,2580.31 R8.2@1549.69,2660.79 1551.65,2660.79 1606.65,2715.79 1606.65,2761.65 1740,2895 2364.88,2895 2478.66,2781.22 U9.5@2514.09,2781.22
  Bottom Layer w6: v2(1090,2005) 1090,2045 1185,2140 1357.9,2140 v2(1360,2142.1)
5VPOWER_EN_03: R13.2 U1.57 U10.5 | length 1639.7
  Top Layer w6: U1.57@1132.95,1903.11 1132.95,1877.52 1280.47,1730 R13.2@1525.31,1730 1527.28,1730 1745.28,1948 2484.36,1948 2531.57,1900.79 U10.5@2531.57,1856.22
5VPOWER_EN_04: R26.2 U1.62 U11.5 | length 2088.6
  Top Layer w6: U1.62@1261.89,1992.68 1327.32,1992.68 v2(1395,1925) ; v2(1395,1665) 1415,1645 1520,1645 1574.37,1590.63 R26.2@1574.37,1340 1576.34,1340 1734.78,1181.56 1734.78,1175.22 v2(1738.26,1171.74) ; v2(1765,1072.9) 1807.9,1030 2495,1030 2530,995 U11.5@2530,932.8
  Bottom Layer w6: v2(1395,1665) v2(1395,1925) ; v2(1738.26,1171.74) 1765,1145 v2(1765,1072.9)
ACC_INT: U1.50 U6.8 | length 1488.9
  Top Layer w6: v2(305,2670) 329.72,2694.72 U6.8@391.69,2694.72 ; U1.50@995.16,1903.11 995.12,1903.15 v2(995.08,1964.92) ; v2(995.08,1964.92) v2(995.08,1964.92)
  Bottom Layer w6: v2(305,2670) 570,2405 570,2180 702,2048 702,1849.97 707.97,1844 874.16,1844 v2(995.08,1964.92)
CHASSIS: pad.1@160,3775 R24.2 | length 210
  Top Layer w6: R24.2@369.57,3775 R24.2@370,3775
  Top Layer w30: pad.1@160,3775 R24.2@369.57,3775
Debug_UART_Rx: P2.3 P6.4 R14.2 | length 4155
  Top Layer w6: v2(510,1775) 570,1715 R14.2@663.09,1715
  Bottom Layer w6: P6.4@155,2570 455,2270 455,1830 v2(510,1775) 550,1815 610,1815 626,1799 626,1414.94 322,1110.94 322,604.97 441.97,485 820,485 960,345 960,215 1088,87 1487,87 1528.43,128.43 P2.3@1528.43,190
Debug_UART_Tx: P2.2 P6.5 R15.2 | length 3997.9
  Top Layer w6: v2@580,1780 595,1765 R15.2@665.31,1765
  Bottom Layer w6: P6.5@155,2470 440,2185 440,1805 495.02,1749.98 497.1,1747.9 521.23,1747.9 553.64,1780.32 v2(579.68,1780.32) 614,1746 614,1419.91 310,1115.91 310,600 437,473 815.03,473 948,340.03 948,210.03 1083.03,75 1491.97,75 1577.64,160.67 P2.2@1577.64,190
FLASH_CS1: U1.56 U7.7 | length 968.6
  Top Layer w6: U7.7@855.94,1320 856.43,1319.51 v2(922.9,1319.51) ; U1.56@1113.27,1903.11 1114,1902.38 1114,1871 1259.94,1725.06 1259.94,1709.94 v2(1256.74,1706.74)
  Bottom Layer w6: v2(922.9,1319.51) 923.38,1320 1040,1320 1115,1395 1115,1648.96 1172.78,1706.74 v2(1256.74,1706.74)
FLASH_CS2: U1.46 U7.6 | length 753.9
  Top Layer w6: U7.6@855.94,1370 v2@915,1370 ; U1.46@916.42,1903.11 916.42,1854.42 832,1770 832,1728 980,1580 v2(980,1370)
  Bottom Layer w6: v2(914.68,1370.32) 914.84,1370.16 979.84,1370.16 v2(980,1370)